# EAGLE board ccard_v2 (EAGLE 5.02)
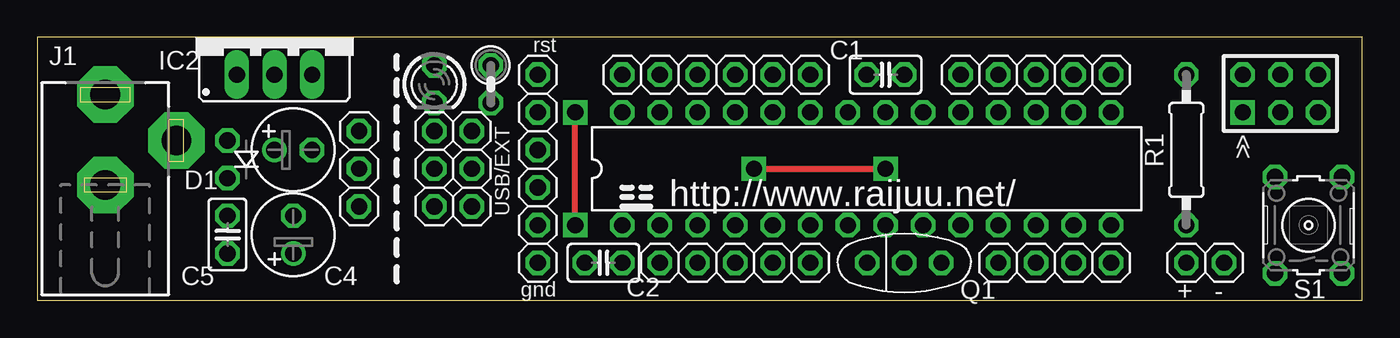
[diagram p0: board, top side]
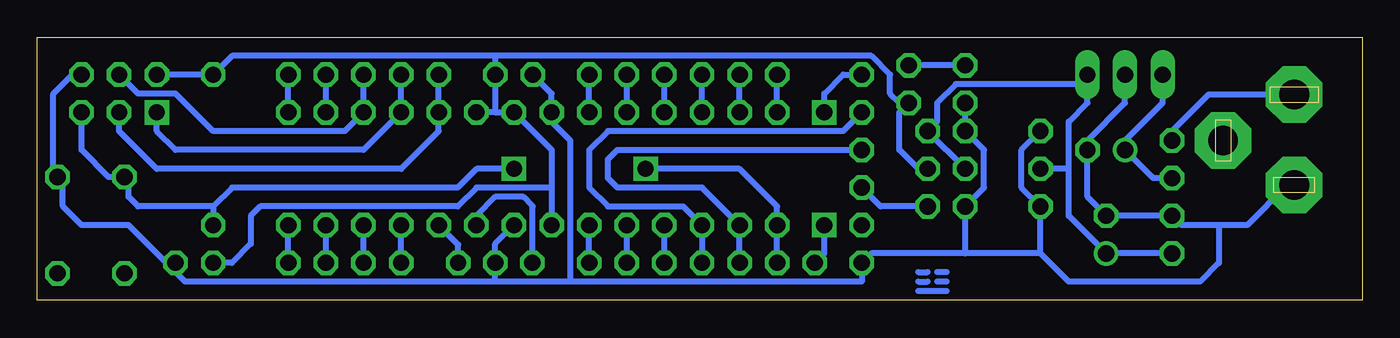
[diagram p1: board, bottom side, seen from below]

Size 89.54 x 17.79 mm. Coordinates in mm from the lower left corner, seen from the top.
Outline: 0,0 89.54,0.01 89.54,17.78 0,17.79 0,0
Copper layers (1*16): Top 0.035mm / dielectric 1.5mm / Bottom 0.035mm
Design rules "default": minimum track width 10mil, minimum drill 24mil, track to track 8mil, track to pad 8mil, pad to pad 8mil, via to via 8mil, smd to smd 8mil, copper to edge 40mil, drill to drill 8mil, minimum pad ring 10mil, minimum via ring 8mil, stop-mask expansion 4mil, vias tented up to drill 0mil, thermal gap 10mil

## Footprints (pad centres in the part's own frame; a part is rotated, then mirrored left to right if it is on the bottom)
C025-025X050 = drill 1.1 octagon: 1 -1.27,0; 2 1.27,0
E2,5-6 = drill 1.1 round: + -1.27,0 | drill 1.1 pad 1.6 octagon: - 1.27,0
D-2.5 = drill 1.1 octagon: A 1.27,1.27; C -1.27,1.27
DIL28-3 = drill 1.1 octagon: 1 -16.51,-3.81; 2 -13.97,-3.81; 3 -11.43,-3.81; 4 -8.89,-3.81; 5 -6.35,-3.81; 6 -3.81,-3.81; 7 -1.27,-3.81; 8 1.27,-3.81; 9 3.81,-3.81; 10 6.35,-3.81; 11 8.89,-3.81; 12 11.43,-3.81; 13 13.97,-3.81; 14 16.51,-3.81; 15 16.51,3.81; 16 13.97,3.81; 17 11.43,3.81; 18 8.89,3.81; 19 6.35,3.81; 20 3.81,3.81; 21 1.27,3.81; 22 -1.27,3.81; 23 -3.81,3.81; 24 -6.35,3.81; 25 -8.89,3.81; 26 -11.43,3.81; 27 -13.97,3.81; 28 -16.51,3.81
78XXS = drill 1.1 long: GND 0,-2.54; IN -2.54,-2.54; OUT 2.54,-2.54
DCJ0202A = drill 2 pad 3.81 octagon: 1 0,3.1; 2 4.8,0; 3 0,-3
AVR-ISP-6 = drill 1.1 square: 1 -2.54,-1.27 | drill 1.1 octagon: 2 -2.54,1.27; 3 0,-1.27; 4 0,1.27; 5 2.54,-1.27; 6 2.54,1.27
1X03 = drill 1.1 octagon: 1 -2.54,0; 2 0,0; 3 2.54,0
1X06 = drill 1.1 octagon: 1 -6.35,0; 2 -3.81,0; 3 -1.27,0; 4 1.27,0; 5 3.81,0; 6 6.35,0
1X02 = drill 1.1 octagon: 1 -1.27,0; 2 1.27,0
1X05 = drill 1.1 octagon: 1 -5.08,0; 2 -2.54,0; 3 0,0; 4 2.54,0; 5 5.08,0
1X04 = drill 1.1 octagon: 1 -3.81,0; 2 -1.27,0; 3 1.27,0; 4 3.81,0
LED3MM = drill 1.1 octagon: A -1.27,0; K 1.27,0
CSTLS_G9 = drill 1.1 octagon: 1 -2.5,0; 2 0,0; 3 2.5,0
0207/10 = drill 1.1 octagon: 1 -5.08,0; 2 5.08,0
0207/2V = drill 1.1 octagon: 1 -1.27,0; 2 1.27,0
B3F-10XX = drill 1.1 octagon: 1 -3.251,2.261; 2 3.251,2.261; 3 -3.251,-2.261; 4 3.251,-2.261

## Placement (x,y rotation side)
C1  0.1uF  [C025-025X050]  57.31,15.25 0 top
C2  0.1uF  [C025-025X050]  38.27,2.54 0 top
C3  10uF/25V  [E2,5-6]  17.31,10.17 0 top
C4  100uF/16V  [E2,5-6]  17.31,4.45 90 top
C5  0.1uF  [C025-025X050]  12.86,4.45 90 top
D1  1N4001  [D-2.5]  14.13,9.53 90 top
IC1  MEGA8-P  [DIL28-3]  56.05,8.9 0 top
IC2  7805  [78XXS]  16.04,17.79 0 top
J1  [DCJ0202A]  4.61,10.8 0 top
JP1  AVR-ISP-6  [AVR-ISP-6]  83.98,13.98 0 top
JP2  [1X03]  26.84,8.9 90 top
JP3  [1X03]  29.38,8.9 90 top
JP4  [1X06]  33.82,8.9 90 top
JP5  [1X02]  78.91,2.54 0 top
JP6  [1X06]  45.88,15.25 180 top
JP7  [1X05]  47.16,2.54 0 top
JP8  [1X04]  68.75,2.54 0 top
JP9  [1X05]  67.48,15.25 180 top
JP10  [1X03]  21.75,8.9 270 top
LED1  [LED3MM]  26.84,14.61 270 top
Q1  16.00 MHz  [CSTLS_G9]  58.59,2.54 0 top
R1  10 K  [0207/10]  77.64,10.17 90 top
R2  1 K  [0207/2V]  30.64,14.61 270 top
S1  [B3F-10XX]  85.89,5.08 90 top
U$1  [LOGO-SMALL-COPPER]  28.11,0.64 0 top
U$5  [LOGO-SMALL]  39.53,6.35 0 top

## Library data of the parts
C1-C5 D1 IC1 IC2 J1 JP1-JP10 LED1 Q1 R1 R2 S1 = ccard
U$1 U$5 = logo

## Nets
#RST: C2.2 IC1.1 JP1.5 R1.1 S1.2
+5V: C1.2 IC1.7 IC1.20 IC1.21 JP1.2 JP3.2 JP5.1 R1.2 R2.2
GND: C1.1 C3.- C4.- C5.2 IC1.8 IC1.22 IC2.GND J1.3 JP1.6 JP2.1 JP2.3 JP4.1 JP5.2 JP10.1 JP10.3 LED1.K Q1.2 S1.4
N$1: D1.A J1.1
N$2: IC1.19 JP1.3 JP9.5
N$3: IC1.18 JP1.1 JP9.4
N$4: IC1.17 JP1.4 JP9.3
N$5: IC1.10 Q1.3
N$6: IC1.9 Q1.1
N$7: IC1.23 JP6.1
N$8: IC1.24 JP6.2
N$9: IC1.25 JP6.3
N$10: IC1.26 JP6.4
N$11: IC1.27 JP6.5
N$12: IC1.28 JP6.6
N$13: IC1.11 JP8.1
N$14: IC1.5 JP7.4
N$15: IC1.4 JP7.3
N$16: LED1.A R2.1
N$17: IC1.16 JP9.2
N$18: IC1.12 JP8.2
N$19: IC1.6 JP7.5
N$20: IC1.13 JP8.3
N$21: IC1.14 JP8.4
N$22: IC1.15 JP9.1
N$23: C3.+ D1.C IC2.IN
N$24: C4.+ C5.1 IC2.OUT JP2.2 JP3.3 JP10.2
N$25: C2.1 JP4.6
RXD: IC1.2 JP4.4 JP7.1
TXD: IC1.3 JP4.5 JP7.2
USB_5V: JP3.1 JP4.3

## Tracks (layer width: path | path; a pad name or v marks a point on that pad's centre or on a via)
#RST  (via drill 1.1)
  Top 0.406: v48.42,8.9 v57.31,8.9
  Bottom 0.406: v57.31,8.9 59.85,8.9 61.12,7.62 76.37,7.62 77.64,6.35 | 77.64,6.35 R1.1 | 77.64,6.35 82.72,6.35 83.35,6.99 83.35,8.26 83.43,8.34 S1.2 84.7,8.34 86.53,10.17 JP1.5 | C2.2 IC1.1 39.53,6.35 42.07,8.9 v48.42,8.9
+5V
  Bottom 0.406: 58.59,12.71 IC1.21 54.77,10.17 54.77,7.62 | 58.59,12.71 IC1.20 | 54.77,7.62 IC1.7 | 58.59,16.52 C1.2 58.59,12.71 | 54.77,7.62 59.85,7.62 61.12,6.35 74.46,6.35 75.1,5.72 75.1,3.81 76.37,2.54 JP5.1 | 58.59,16.52 76.37,16.52 R1.2 JP1.2 | JP3.2 30.01,8.9 31.28,10.17 31.28,12.71 R2.2 31.28,13.34 31.91,13.98 31.91,15.25 33.19,16.52 58.59,16.52
GND
  Bottom 0.406: C1.1 54.77,13.98 IC1.22 54.77,12.07 53.51,10.8 53.51,1.27 | 58.59,3.81 Q1.2 58.59,1.27 | 58.59,3.81 IC1.8 | 58.59,1.27 58.59,3.81 | 58.59,1.27 79.54,1.27 80.18,1.91 JP5.2 80.81,2.54 83.35,5.08 86.53,5.08 87.8,6.35 87.8,8.26 | 53.51,1.27 58.59,1.27 | LED1.K JP2.3 25.56,10.17 25.56,7.62 JP2.1 26.84,3.18 | 9.69,5.08 12.23,5.08 C5.2 C4.- 18.58,6.99 C3.- 18.58,10.8 16.04,13.34 IC2.GND | 9.69,5.08 9.69,2.54 10.96,1.27 19.85,1.27 21.75,3.18 | 53.51,1.27 33.82,1.27 JP4.1 33.19,3.18 26.84,3.18 | J1.3 5.07,7.8 7.79,5.08 9.69,5.08 | JP10.1 23.02,10.17 23.02,7.62 JP10.3 21.75,3.18 | JP1.6 87.16,15.25 88.43,13.98 88.43,8.9 87.8,8.26 | 87.8,8.26 87.87,8.34 S1.4 | 21.75,3.18 26.84,3.18
N$1
  Bottom 0.406: J1.1 10.4,13.9 12.86,11.44 D1.A
N$2
  Bottom 0.406: JP9.5 IC1.19 62.39,11.44 64.94,8.9 81.45,8.9 83.98,11.44 JP1.3
N$3
  Bottom 0.406: JP9.4 IC1.18 67.48,10.17 80.18,10.17 81.45,11.44 JP1.1
N$4
  Bottom 0.406: JP9.3 IC1.17 68.75,11.44 77.64,11.44 80.18,13.98 82.72,13.98 JP1.4
N$5
  Bottom 0.406: Q1.3 61.09,3.77 IC1.10
N$6
  Bottom 0.406: IC1.9 59.85,5.72 58.59,6.99 56.68,6.99 56.05,6.35 56.05,2.54 Q1.1
N$7
  Bottom 0.406: IC1.23 JP6.1
N$8
  Bottom 0.406: IC1.24 JP6.2
N$9
  Bottom 0.406: IC1.25 JP6.3
N$10
  Bottom 0.406: IC1.26 JP6.4
N$11
  Bottom 0.406: IC1.27 JP6.5
N$12
  Bottom 0.406: IC1.28 JP6.6
N$13
  Bottom 0.406: JP8.1 IC1.11
N$14
  Bottom 0.406: JP7.4 IC1.5
N$15
  Bottom 0.406: JP7.3 IC1.4
N$16
  Bottom 0.406: LED1.A R2.1
N$17
  Bottom 0.406: IC1.16 JP9.2
N$18
  Bottom 0.406: JP8.2 IC1.12
N$19
  Bottom 0.406: JP7.5 IC1.6
N$20
  Bottom 0.406: JP8.3 IC1.13
N$21
  Bottom 0.406: JP8.4 IC1.14
N$22
  Bottom 0.406: IC1.15 JP9.1
N$23
  Bottom 0.406: D1.C 14.13,8.26 C3.+ 16.04,10.8 13.5,13.34 IC2.IN
N$24
  Bottom 0.406: C5.1 C4.+ 19.85,5.72 19.85,8.9 | JP3.3 JP2.2 JP3.3 | 19.85,8.9 19.85,12.07 18.58,13.34 IC2.OUT 19.21,14.61 27.47,14.61 28.74,13.34 28.74,12.07 JP3.3 | 19.85,8.9 JP10.2
N$25  (via drill 1.1)
  Top 0.406: v36.36,5.08 v36.36,12.71
  Bottom 0.406: C2.1 36.36,3.18 v36.36,5.08 | JP4.6 35.09,15.25 36.36,13.98 v36.36,12.71
RXD
  Bottom 0.406: JP4.4 50.33,10.17 50.96,9.53 50.96,8.26 50.33,7.62 44.62,7.62 IC1.2 JP7.1
TXD
  Bottom 0.406: JP4.5 35.09,11.44 50.96,11.44 52.23,10.17 52.23,7.62 50.96,6.35 45.88,6.35 IC1.3 JP7.2
USB_5V
  Bottom 0.406: JP3.1 32.55,6.35 JP4.3

## Text on the board
tNames: rst | > | > | USB/EXT | http://www.raijuu.net/ | gnd | + | -